# Altium PCB PCB1.PcbDoc
Units mm, origin at the board's own origin, x right, y up, seen from the top; angles counter-clockwise.
Board outline 87 x 60 mm, 4 copper layers (Top Layer, Internal Plane 1, Internal Plane 2, Bottom Layer), stack 0.462 mm thick; 29 components, 29 nets, 125 pads, 0 vias.
Unrouted connection lines stored in the file: 78.
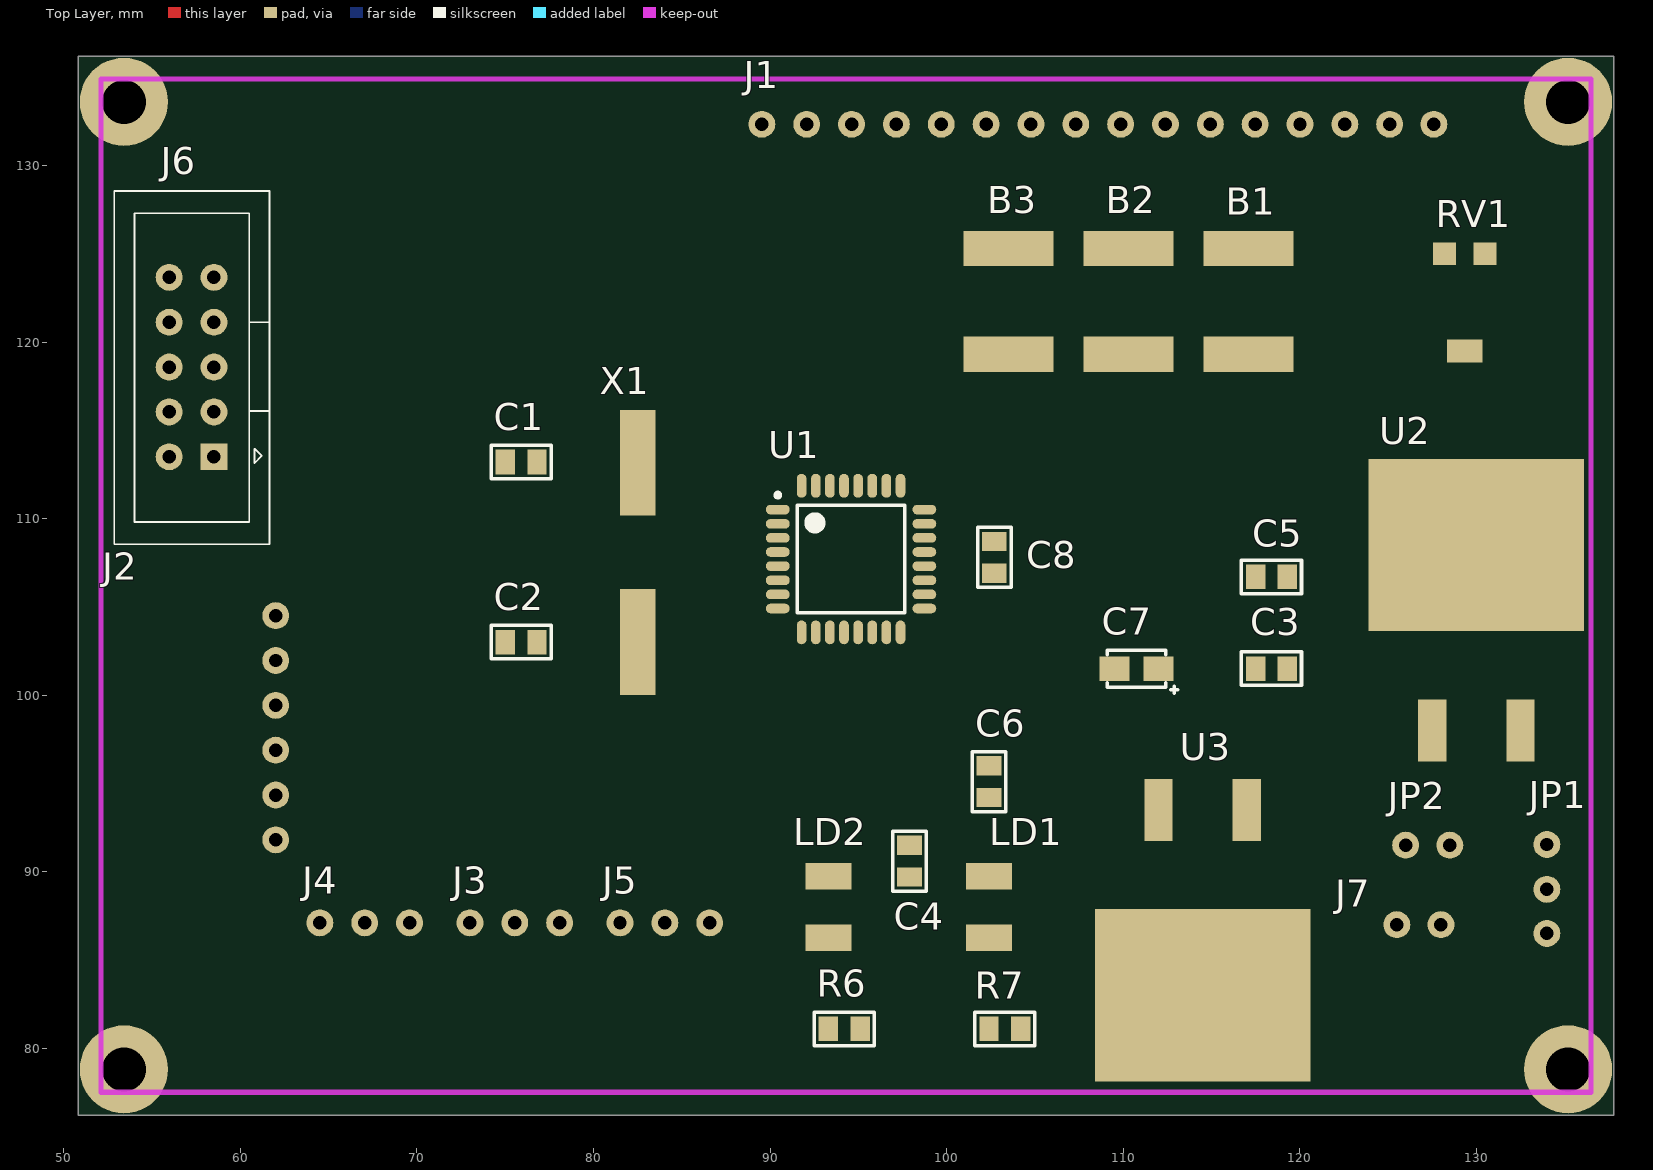
[diagram p0: Top Layer view]
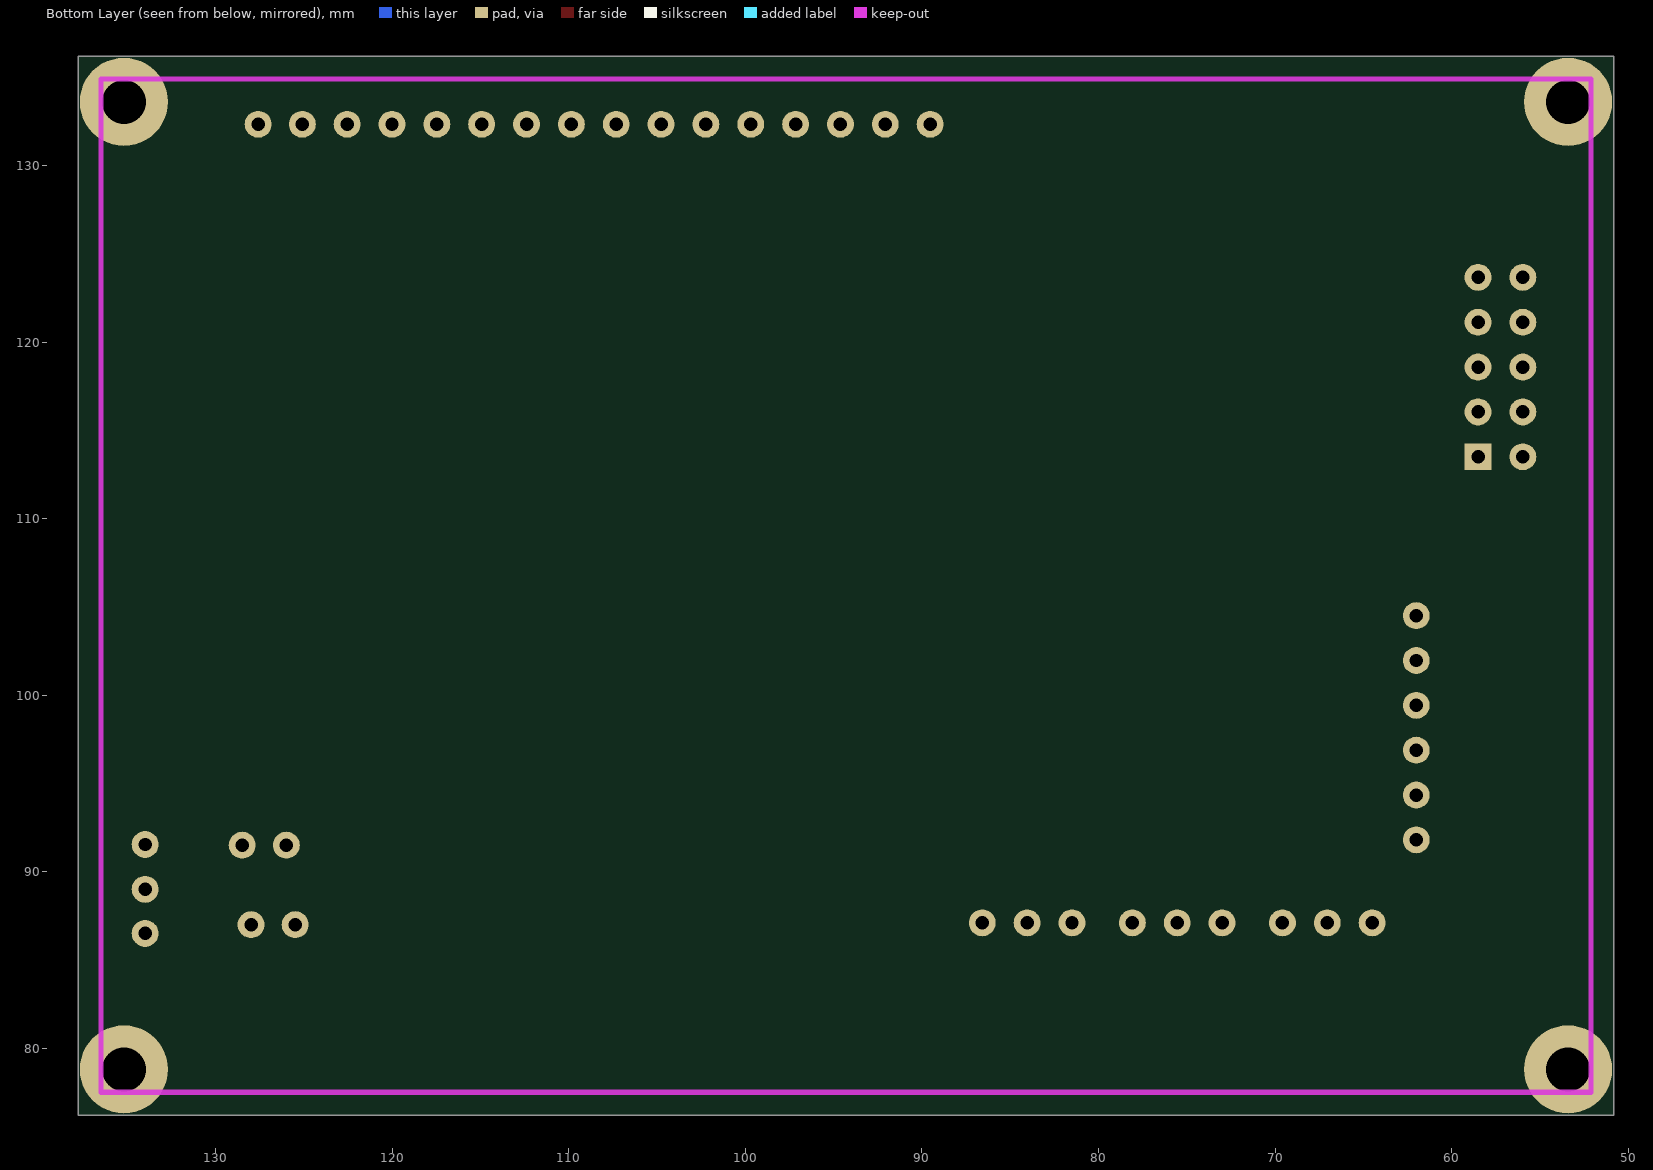
[diagram p1: Bottom Layer view, seen from below]
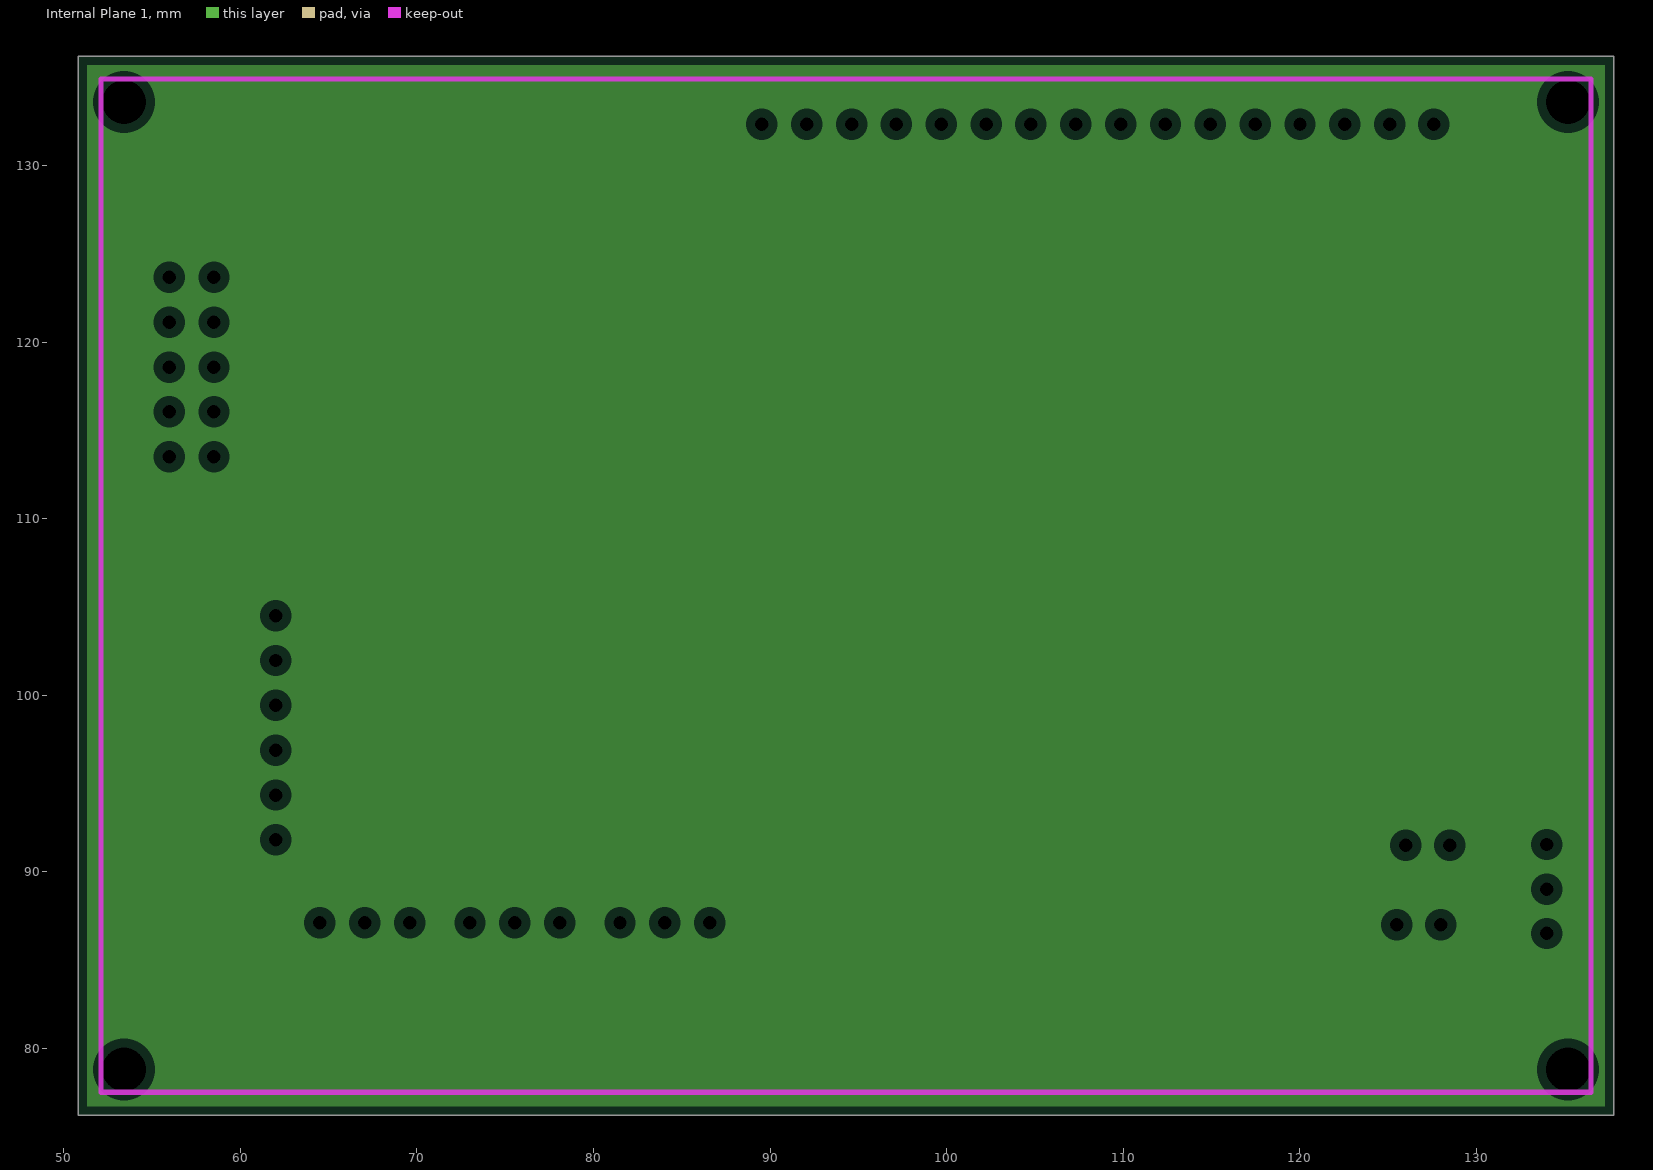
[diagram p2: Internal Plane 1, clearances drawn from the general rule]
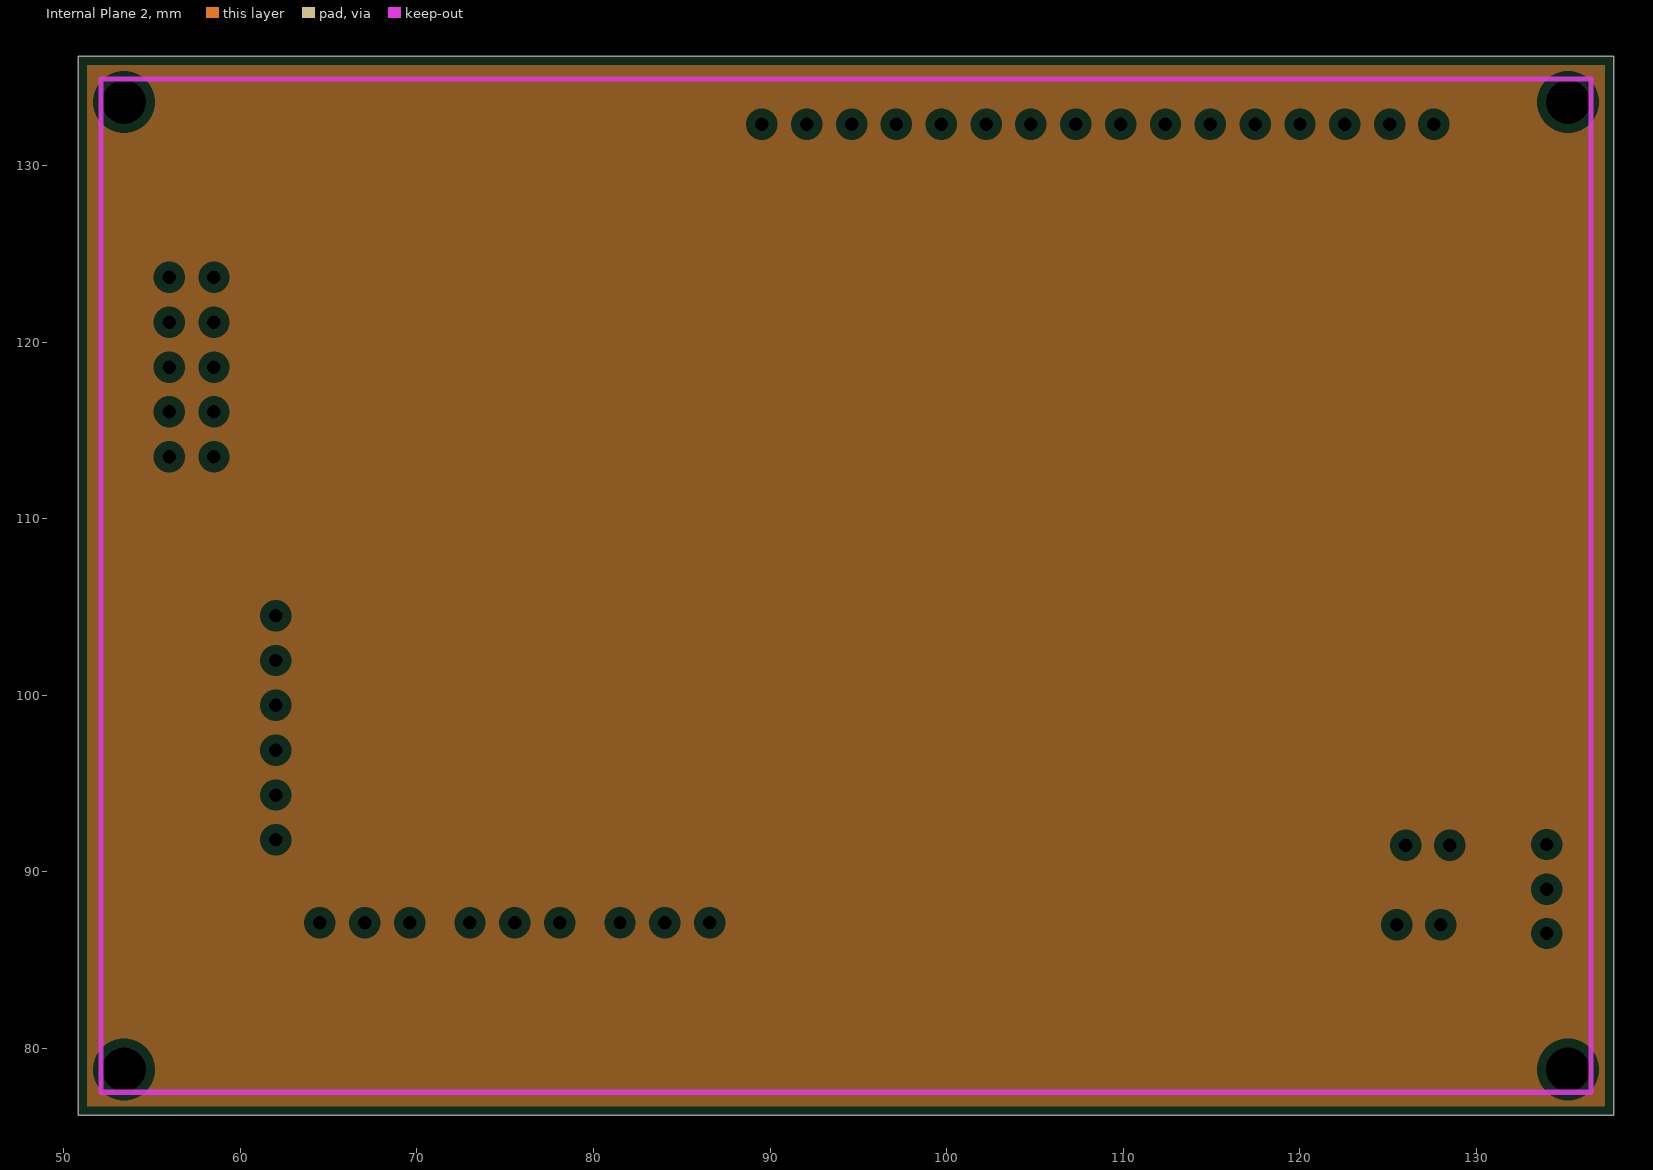
[diagram p3: Internal Plane 2, clearances drawn from the general rule]

## Layer stack, top to bottom
Top Solder: solder mask 0.0102, Solder Resist, Dk 3.5
Top Layer: signal copper 0.0356
Internal Plane 1: plane copper 0.0356
Internal Plane 2: plane copper 0.0356
Dielectric 1: dielectric 0.32, FR-4, Dk 4.8
Bottom Layer: signal copper 0.0356
Bottom Solder: solder mask 0.0102, Solder Resist, Dk 3.5

## Board outline
50.8,76.2 137.8,76.2 137.8,136.2 50.8,136.2

## Design rules (kind name [scope] priority, off if disabled: settings)
Clearance [All] p1: gap=0.2
PlaneClearance [All] p1: clearance=0.508
PlaneConnect [All] p1: planeconnectstyle=Relief reliefexpansion=0.508 reliefentries=4 reliefconductorwidth=0.254 reliefairgap=0.254
PolygonConnect [All] p1: connectstyle=Relief reliefconductorwidth=0.254 reliefentries=4 polygonreliefangle="90 Angle" airgapwidth=0.254
RoutingVias [All] p1: holewidth=0.5 width=1 viastyle="Through Hole" minholewidth=0.711 minwidth=1.27 maxholewidth=0.711 maxwidth=1.27
SolderMaskExpansion [All] p1: expansion=0.102
Width [All] p1: maxlimit=0.2 minlimit=0.2 preferedwidth=0.2
28 further rules are at their usual default settings.

## Components (designator, comment, footprint, x,y, rotation, side; value= is the part's Value field where it differs from the comment)
B1 "Button" "Button 5x5" 117.1,122.3 r270 top
B2 "Выбор формата выводимых данных" "Button 5x5" 110.3,122.3 r90 top
B3 "Сохранение позиции курса" "Button 5x5" 103.5,122.3 r90 top
C1 "С0805" 0805 75,113.2 r0 top
C2 "С0805" 0805 75,103 r0 top
C3 "С0805" 0805 117.5,101.5 r0 top
C4 "С0805" 0805 97.9,91.5 r270 top
C5 "С0805" 0805 117.5,106.7 r0 top
C6 "С0805" 0805 102.4,96 r270 top
C7 "С3/4" A 112,101.5 r180 top
C8 "С0805" 0805 102.7,106.9 r90 top
J1 "LCD" LCD 127.635,132.334 r180 top
J2 "MG-10-222" "DS1022 1x6" 62,104.5 r270 top
J3 "Servo" "DS1022 1x3" 73,87.1 r0 top
J4 "Servo" "DS1022 1x3" 64.5,87.1 r0 top
J5 "Servo" "DS1022 1x3" 81.5,87.1 r0 top
J6 "Вилка ВН-10" "Вилка ВН-10" 58.5,113.5 r90 top
J7 "Input power" "Input power" 128,87 r0 top
JP1 "Jumper 3" "JUMPER 3" 134,89 r90 top
JP2 "Jumper" Jumper 126,91.5 r0 top
LD1 "LED" LED 102.4,88 r270 top
LD2 "LED" LED 93.3,88 r270 top
R6 "R0805" 0805 93.3,81.1 r0 top
R7 "R0805" 0805 102.4,81.1 r0 top
RV1 "POT" POT 128.2,125 r0 top
U1 "ATmega8" ATmega8 90.5,110.5 r0 top
U2 "7805 SMD" "7805 SMD" 130,108.5 r0 top
U3 "7805 SMD" "7805 SMD" 114.5,83 r180 top
X1 "XTAL" HC-49SM 82.5,103 r90 top

## Footprints (in the part's own frame and the unit in brackets; to place one, negate y for a bottom-side part, rotate by r counter-clockwise, add the part's x,y. Pads: shape width x height; smd on the part's side, far side on the other; paste and mask are expansions set on the pad)
0805 [mm]
  rect 1.1x1.4 smd: 1(0,0) 2(1.8,0)
  silkscreen extent -0.8,-0.95 2.6,0.95, body extent -0.4,-0.68 2.2,0.68, height 0.9
"7805 SMD" [mm]
  rect 1.6x3.5 smd: 1(-2.5,-10.5) 3(2.5,-10.5)
  rect 12.2x9.75 smd: 2(0,0)
  body extent -5.28,-11.65 5.36,4.2, height 4.8
A [mm]
  rect 1.7x1.4 smd: 1(0,0) 2(2.5,0)
  silkscreen extent -1.1,-1.05 2.9,1.4, body extent -0.47,-0.82 2.92,0.77, height 1.6
ATmega8 [mm]
  oval 1.35x0.55 smd: 1(-0.063,0.006) 2(-0.063,-0.794) 3(-0.063,-1.594) 4(-0.063,-2.394) 5(-0.063,-3.194) 6(-0.063,-3.994) 7(-0.063,-4.794) 8(-0.063,-5.594) 17(8.237,-5.594) 18(8.237,-4.794) 19(8.237,-3.994) 20(8.237,-3.194) 21(8.237,-2.394) 22(8.237,-1.594) 23(8.237,-0.794) 24(8.237,0.006)
  oval 0.55x1.35 smd: 9(1.287,-6.944) 10(2.087,-6.944) 11(2.887,-6.944) 12(3.687,-6.944) 13(4.487,-6.944) 14(5.287,-6.944) 15(6.087,-6.944) 16(6.887,-6.944) 25(6.887,1.356) 26(6.087,1.356) 27(5.287,1.356) 28(4.487,1.356) 29(3.687,1.356) 30(2.887,1.356) 31(2.087,1.356) 32(1.287,1.356)
  silkscreen extent -0.19,-5.84 7.14,0.96, body extent -0.41,-7.29 8.59,1.71, height 1.08
"Button 5x5" [mm]
  rect 2x5.08 smd: 1(-3,0) 2(3,0)
  body extent -3.25,-2.54 3.25,2.54, height 1.52
"DS1022 1x3" [mil]
  round 60 hole 30: 1(0,0) 2(100,0) 3(200,0)
  body extent -50,-395 250,13, height 98
"DS1022 1x6" [mil]
  round 60 hole 30: 1(0,0) 2(100,0) 3(200,0) 4(300,0) 5(400,0) 6(500,0)
  body extent -50,-397 550,11, height 98
HC-49SM [mm]
  rect 6x2 smd: 1(0,0) 2(10.16,0)
  body extent -1.62,-2.4 11.78,2.4, height 4
"Input power" [mil]
  round 60 hole 30: 1(-98.49,-0.07) 2(-0.06,-0.07)
  body extent -150,-395 50,13, height 98
Jumper [mil]
  round 60 hole 30: 1(0,0) 2(98.43,0)
  body extent -50,-50 150,50, height 339
"JUMPER 3" [mil]
  round 60 hole 30: 1(-98.43,0) 2(0,0) 3(100,0)
  body extent -150,-50 150,50, height 339
LCD [mil]
  round 60 hole 30: 1(1.57,0) 2(100,0) 3(200,0) 4(300,0) 5(400,0) 6(500,0) 7(600,0) 8(700,0) 9(800,0) 10(900,0) 11(1000,0) 12(1100,0) 13(1200,0) 14(1300,0) 15(1400,0) 16(1500,0)
  body extent -50,-50 1550,50, height 339
LED [mm]
  rect 1.5x2.6 smd: 1(-1.75,0) 2(1.75,0)
  body extent -1.75,-1.4 1.75,1.4, height 0.95
POT [mm]
  rect 1.3x1.3 smd: 1(0,0) 3(2.3,0)
  rect 2x1.3 smd: 2(1.15,-5.5)
"Вилка ВН-10" [mil]
  rect 60x60 hole 30: 1(0,0)
  round 60 hole 30: 2(0,100) 3(100,0) 4(100,100) 5(200,0) 6(200,100) 7(300,0) 8(300,100) 9(400,0) 10(400,100)
  silkscreen extent -195,-124 593,222, body extent -202,-127 600,235, height 348

## Part data
B2 B3: library part Button

## Free pads (board coordinates)
  round 5 hole 2.5: 0(135.2,78.8) 1(53.4,78.8) 2(53.4,133.6) 3(135.2,133.6)

## Nets (pads, with @x,y where several pads share a name; then routed paths per layer and width w, separated by ;. In a path a pad name is that pad's centre, name@x,y a point inside that pad or via, vN(x,y) a via of type N, cw(c..) or ccw(c..) an arc to the next point about the centre after c; other vN are vias at no path point)
DB4: J1.11 U1.25
DB5: J1.12 U1.26
DB6: J1.13 U1.27
DB7: J1.14 U1.28
E: J1.6 U1.24
GND: B1.2 B2.1 B3.1 C1.1 C2.1 C3.1 C4.1 C5.1 C6.1 C7.2 C8.2 J1.1 J1.5 J2.2 J3.3 J4.3 J5.3 J6.4 J6.6 J6.8 J6.10 J7.2 R6.2 R7.2 RV1.3 U1.3 U1.5 U1.21 U2.2 U3.2
MISO: J6.9 U1.16
MOSI: J6.1 U1.15
NetB1_1: B1.1 U1.32
NetB2_2: B2.2 U1.1
NetB3_2: B3.2 U1.2
NetC1_2: C1.2 U1.8 X1.2
NetC2_2: C2.2 U1.7 X1.1
NetC3_2: C3.2 C5.2 JP1.3 U2.1 U3.1
NetJ1_3: J1.3 RV1.2
NetJ2_3: J2.3 U1.30
NetJ2_4: J2.4 U1.31
NetJ7_1: J7.1 JP1.2
NetLD1_2: LD1.2 R7.1
NetLD2_2: LD2.2 R6.1
PWM1: J3.1 U1.12
PWM2: J4.1 U1.13
PWM3: J5.1 U1.14
RES: J6.5
RESET: U1.29
RS: J1.4 U1.23
SCK: J6.7 U1.17
VS: C4.2 J3.2 J4.2 J5.2 JP2.2 LD2.1 U2.3
VSS: C6.2 C7.1 C8.1 J1.2 J2.1 J6.2 JP1.1 JP2.1 LD1.1 RV1.1 U1.4 U1.6 U1.18 U1.20 U3.3
pads on no net: J1.7 J1.8 J1.9 J1.10 J1.15 J1.16 J2.5 J2.6 J6.3 U1.9 U1.10 U1.11 U1.19 U1.22

## Keep-outs
Keep-Out Layer:
  lines w0.3: 52.1,77.5 136.5,77.5 136.5,134.9 52.1,134.9 52.1,77.5